# Altium PCB Sampler_4HP.PCBDOC (part 3 of 6)
Units mm, origin at the board's own origin, x right, y up, seen from the top; angles counter-clockwise.
Board outline 159.99 x 100 mm, 4 copper layers (Top, GP1(GND), L3, Bot), stack 1.648 mm thick; 546 components, 321 nets, 1657 pads, 795 vias.
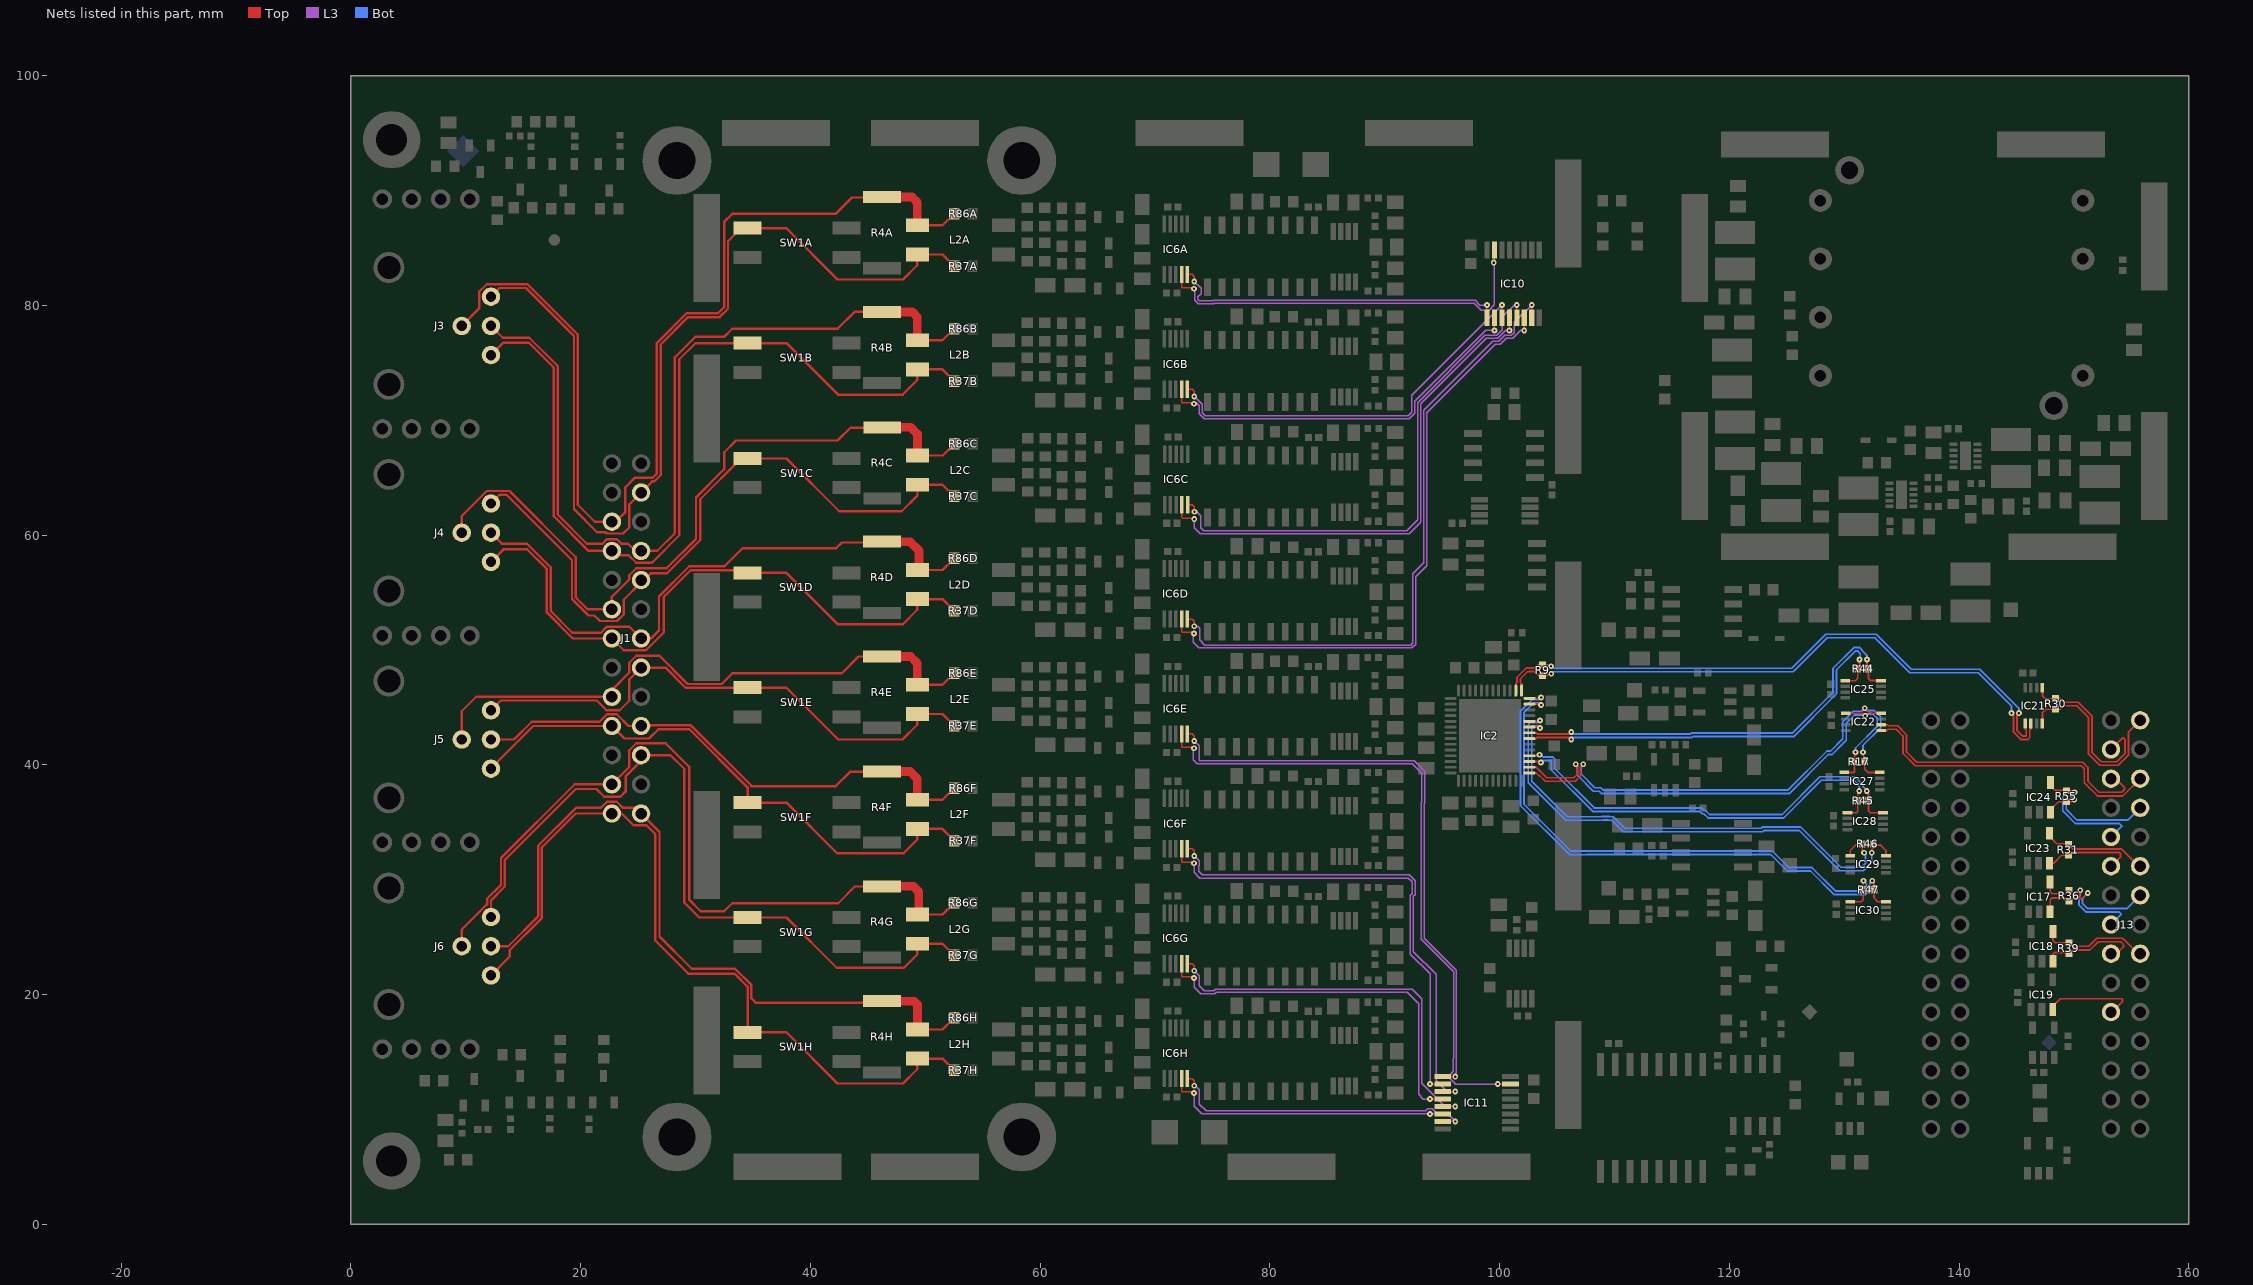
[diagram p4: the nets of this part, all layers, seen from the top]

## Part data (continued)
R53: library part R0402_51K_1%_0.0625W_100PPM, "Resistor - 1%", Case=0402, Manufacturer=GENERIC, Manufacturer1 ComponentHeight=0.4mm, Manufacturer1 Example="YAGEO PHYCOMP", Manufacturer1 Part Number=232270674703L, Power=0.0625W, Tolerance=±1%, Author="CERN DEM JLC", Component Type=Standard, CreateDate=03.12.2007, HelpURL=\\cern.ch\dfs\Applications\Altium\Datasheets\R0402_Phycomp_RC0402.pdf, LatestRevisionDate=17.10.2012, Manufacturer Part Number=R0402_51K_1%_0.0625W_100PPM, Mounted=Yes, Part Description="General Purpose Thick Film Chip Resistor", Part Number=R0402_51K_1%_0.0625W_100PPM, Pin Count=2, PressFit=No, Sense=No, SMD=Yes, Socket=No, Status="Not Recommended", TC=±100ppm/°C
R54: library part R0402_47K_1%_0.0625W_100PPM, "Resistor - 1%", Case=0402, Manufacturer=GENERIC, Manufacturer1 ComponentHeight=0.4mm, Manufacturer1 Example="YAGEO PHYCOMP", Manufacturer1 Part Number=232270675103L, Power=0.0625W, Tolerance=±1%, Author="CERN DEM JLC", Component Type=Standard, CreateDate=03.12.2007, HelpURL=\\cern.ch\dfs\Applications\Altium\Datasheets\R0402_Phycomp_RC0402.pdf, LatestRevisionDate=17.10.2012, Manufacturer Part Number=R0402_47K_1%_0.0625W_100PPM, Mounted=Yes, Part Description="General Purpose Thick Film Chip Resistor", Part Number=R0402_47K_1%_0.0625W_100PPM, Pin Count=2, PressFit=No, Sense=No, SMD=Yes, Socket=No, Status="Not Recommended", TC=±100ppm/°C
R58 R59 R60 R61 R62 R63 R64 R65 R66 R67: library part R0603_220R_1%_0.1W_100PPM, "Resistor - 1%", Case=0603, Manufacturer=GENERIC, Manufacturer1 ComponentHeight=0.55mm, Manufacturer1 Example="NIC COMPONENT", Manufacturer1 Part Number=NRC06F2200TRF, Power=0.1W, Tolerance=±1%, Author="CERN DEM JLC", Component Type=Standard, CreateDate=03.12.2007, HelpURL=\\cern.ch\dfs\Applications\Altium\Datasheets\R0603_NIC_NRC.pdf, LatestRevisionDate=13.03.2008, Manufacturer Part Number=R0603_220R_1%_0.1W_100PPM, Mounted=Yes, Part Description="General Purpose Thick Film Chip Resistor", Part Number=R0603_220R_1%_0.1W_100PPM, Pin Count=2, Sense=No, SMD=Yes, Socket=No, Status=Preferred, TC=±100ppm/°C
RN1A RN1B RN1C RN1D RN1E RN1F RN1G RN1H RN2A RN2B RN2C RN2D RN2E RN2F RN2G RN2H RN3 RN4: library part RN_10K_5K_VISHAY_AORN2-1AT3, "DIL8 Resistor Network 4 Resistors 10k-5k-5k-10k 0.1%", Case=SOIC8, Manufacturer="VISHAY DALE", Manufacturer Part Number=AORN2-1AT3, Power=4x0.1W, Tolerance=0.1%, Author="CERN DEM JLC", ComponentHeight=1.73mm, Component Type=Standard, CreateDate=20.02.2017, HelpURL=\\cern.ch\dfs\Applications\Altium\Datasheets\RN_VISHAY_AORN.pdf, LatestRevisionDate=20.02.2017, Mounted=Yes, Part Description="Dual-In-Line Thin Film Precision Automotive Resistors Network, (4 Isolated) - AORN Series", Part Number=RN_10K_5K_VISHAY_AORN2-1AT3, Pin Count=8, PressFit=No, Sense=No, SMD=Yes, Socket=No, TC=±25ppm/°C
SW1A SW1B SW1C SW1D SW1E SW1F SW1G SW1H: library part SW_CTS_204-121ST, "2x SPST DIP Switch 1NO + 1NF", Manufacturer=CTS, Manufacturer Part Number=204-121ST, Author="CERN DEM JLC", ComponentHeight=10.36mm, Component Type=Standard, CreateDate=28.08.2014, Family=Switch, HelpURL=\\cern.ch\dfs\Applications\Altium\Datasheets\SW_CTS_204-121ST.pdf, LatestRevisionDate=28.08.2014, Mounted=Yes, PackageDescription="Body 7.26 x 9.78mm, 2x SPST DIP, 1NO + 1NF Switch, CTS 204 Series", Part Description="Coupled SPST DIP Switch, 1NO + 1NF, CTS 204 Series", Part Number=SW_CTS_204-121ST, Pin Count=4, PressFit=No, Sense=No, SMD=Yes, Socket=No, Status=None
T1 T2 T3 T4 T5 T6 T7 T8 T9: "N-CHANNEL MOSFET WITH DIODE", Case=SOT23-3, Manufacturer="ON SEMICONDUCTOR", Author="CERN DEM JLC", Bonding=No, ComponentHeight=1.11mm, Component Type=Standard, CreateDate=23.03.2009, Device=BSS138LT1G, HelpURL=\\cern.ch\dfs\Applications\Altium\Datasheets\BSS138LT1G.pdf, LatestRevisionDate=23.03.2009, Manufacturer Part Number=BSS138LT1G, Mounted=Yes, PackageDescription="SOT23 3-Leads, Pitch 0.95mm - Body 1.4x3mm, IPC Medium Density", Part Description="50V 200mA N-Channel Enhancement Mode Field-Effect Transistor", Part Number=BSS138LT1G, Pin Count=3, PressFit=No, Sense=No, SMD=Yes, Socket=No
TP1 TP2 TP3 TP4 TP5 TP6 TP7 TP8 TP9 TP10 TP11 TP12 TP13: library part SMD_PAD_1.27X1.27MM, Author="CERN DEM JLC", ComponentHeight=0mm, Component Type="Standard (No BOM)", CreateDate=12.01.2008, Family="Test Point", HelpURL=Undefined, LatestRevisionDate=12.01.2008, Mounted=No, PackageDescription="1.27mm x 1.27mm PCB Copper Area (SMD Test Point)", Part Description="1.27mm x 1.27mm PCB Copper Area (SMD Test Point)", Part Number=SMD_PAD_1.27X1.27MM, Pin Count=1, Sense=No, SMD=Yes, Socket=No, Status=None

## Free pads (board coordinates)
  round 6 hole 3.2: 0(58.4,7.6) 1(58.4,92.6) 2(28.4,92.6) 3(28.4,7.6)

## Via types
v1: diameter 0.5, hole 0.2, Top to Bot, tented both sides, 760 vias
v2: diameter 0.6, hole 0.3, Top to Bot, tented both sides, 15 vias
v3: diameter 1, hole 0.6, Top to Bot, tented both sides, 8 vias
v4: diameter 0.5, hole 0.2, Top to Bot, 6 vias
v5: diameter 0.6, hole 0.3, Top to Bot, 6 vias

## Nets (pads, with @x,y where several pads share a name; then routed paths per layer and width w, separated by ;. In a path a pad name is that pad's centre, name@x,y a point inside that pad or via, vN(x,y) a via of type N, cw(c..) or ccw(c..) an arc to the next point about the centre after c; other vN are vias at no path point)
ADC_CLKOUT_N: IC2.34 IC25.8 R44.2 | length 37.5
  Top w0.152: IC2.34@102.595,42.785 103.196,42.785 103.294,42.688 106.076,42.688 v1(106.25,42.862) ; v1(131.983,49.171) 131.983,48.509 R44.2@132.126,48.365 132.126,47.506 132.286,47.346 133.181,47.346 IC25.8@133.202,47.325
  Bot w0.152: v1(106.25,42.862) 106.25,42.738 106.3,42.688 116.616,42.688 116.686,42.758 125.483,42.758 129.03,46.305 129.03,48.405 130.83,50.205 131.351,50.205 131.53,50.026 131.53,49.976 131.616,49.891 131.983,49.523 v1(131.983,49.171)
ADC_CLKOUT_P: IC2.33 IC25.1 R44.1 | length 36.9
  Top w0.152: IC2.33@102.595,42.285 103.196,42.285 103.294,42.383 106.076,42.383 v1(106.25,42.209) ; IC25.1@130.102,47.325 130.99,47.325 131.186,47.521 R44.1@131.186,48.365 131.33,48.509 v1(131.33,49.171)
  Bot w0.152: v1(106.25,42.209) 106.25,42.333 106.3,42.383 116.742,42.383 116.812,42.453 125.609,42.453 129.156,46 129.335,46.179 129.335,48.279 130.956,49.9 131.225,49.9 131.225,49.85 131.4,49.675 131.4,49.241 v1(131.33,49.171)
ADC_IN_N0: J1.23 J3.1 L2A.2 R37A.1 SW1A.1 | length 84.3
  Top w0.203: J3.1@12.2,80.746 12.954,81.5 15.25,81.5 19.431,77.319 19.431,62.255 21.438,60.249 22.186,60.249 22.304,60.131 23.708,60.131 24.241,60.665 24.241,62.671 J1.23@25.27,63.7 26.24,64.67 26.42,64.67 26.975,65.225 26.975,76.583 29.362,78.97 32.107,78.97 32.832,79.695 32.832,85.573 33.969,86.71 SW1A.1@34.542,86.71 37.922,86.71 42.382,82.25 48.073,82.25 49.316,83.493 L2A.2@49.316,84.424 51.504,84.424 R37A.1@52.52,83.408
ADC_IN_N1: J1.20 J3.3 L2B.2 R37B.1 SW1B.1 | length 76.9
  Top w0.203: J3.3@12.2,75.666 13.284,76.75 15.5,76.75 17.678,74.572 17.678,61.646 20.704,58.62 J1.20@22.73,58.62 23.1,58.25 24.185,58.25 24.844,57.591 26.216,57.591 28.6,59.975 28.6,75.3 30,76.7 33.959,76.7 33.969,76.71 SW1B.1@34.542,76.71 37.922,76.71 42.407,72.225 48.048,72.225 49.316,73.493 L2B.2@49.316,74.424 51.504,74.424 R37B.1@52.52,73.408
ADC_IN_N2: J1.17 J4.1 L2C.2 R37C.1 SW1C.1 | length 59.6
  Top w0.203: J4.1@12.2,62.746 12.954,63.5 13.549,63.5 19.25,57.799 19.25,54.436 20.686,53 21.193,53 21.682,52.511 23.174,52.511 23.759,53.096 23.759,54.369 J1.17@25.27,55.88 ; J1.17@25.27,56.08 25.53,56.08 26.125,56.675 27.525,56.675 30.425,59.575 30.425,63.109 33.981,66.666 SW1C.1@34.555,66.666 37.935,66.666 42.526,62.075 47.954,62.075 49.329,63.449 L2C.2@49.329,64.38 51.517,64.38 R37C.1@52.533,63.364
ADC_IN_N3: J1.14 J4.3 L2D.2 R37D.1 SW1D.1 | length 55.2
  Top w0.203: J4.3@12.2,57.666 13.284,58.75 15.367,58.75 17.069,57.048 17.069,53.248 19.317,51 J1.14@22.73,51 23.759,49.971 25.696,49.971 27.25,51.525 27.25,54.6 29.6,56.95 33.729,56.95 33.969,56.71 SW1D.1@34.542,56.71 37.922,56.71 42.407,52.225 48.048,52.225 49.316,53.493 L2D.2@49.316,54.424 51.504,54.424 R37D.1@52.52,53.408
ADC_IN_N4: J1.11 J5.1 L2E.2 R37E.1 SW1E.1 | length 48.1
  Top w0.203: J5.1@12.2,44.746 13.047,45.593 21.404,45.593 22.25,44.746 23.41,44.746 24.241,45.577 24.241,47.431 J1.11@25.27,48.46 27.39,48.46 29.14,46.71 SW1E.1@34.542,46.71 37.922,46.71 42.432,42.2 48.023,42.2 49.316,43.493 L2E.2@49.316,44.424 51.504,44.424 R37E.1@52.52,43.408
ADC_IN_N5: J1.8 J5.3 L2F.2 R37F.1 SW1F.1 | length 49.8
  Top w0.203: J5.3@12.2,39.666 12.2,39.7 15.88,43.38 J1.8@22.73,43.38 23.819,42.291 26,42.291 26,42.325 26.775,43.1 29.475,43.1 34.542,38.033 SW1F.1@34.542,36.71 37.922,36.71 42.332,32.3 48.123,32.3 49.316,33.493 L2F.2@49.316,34.424 51.504,34.424 R37F.1@52.52,33.408
ADC_IN_N6: J1.5 J6.1 L2G.2 R37G.1 SW1G.1 | length 65.8
  Top w0.203: J6.1@12.2,26.746 12.2,28.2 13.411,29.411 13.411,31.725 19.583,37.897 21.387,37.897 22.073,37.211 23.47,37.211 23.927,37.668 23.927,38.989 J1.5@25.27,40.332 ; J1.5@25.27,40.84 27.835,40.84 29.025,39.65 29.025,28.025 30.34,26.71 SW1G.1@34.542,26.71 37.922,26.71 42.307,22.325 48.148,22.325 49.316,23.493 L2G.2@49.316,24.424 51.504,24.424 R37G.1@52.52,23.408
ADC_IN_N7: J1.2 J6.3 L2H.2 R37H.1 SW1H.1 | length 69.5
  Top w0.203: J6.3@12.2,21.666 13.843,23.309 13.843,23.876 16.637,26.67 16.637,32.817 19.58,35.76 J1.2@22.73,35.76 23.593,35.76 24.614,34.739 24.836,34.739 24.844,34.731 25.744,34.731 26.5,33.975 26.5,24.7 29.375,21.825 33.4,21.825 34.542,20.683 SW1H.1@34.542,16.71 37.922,16.71 42.382,12.25 48.073,12.25 49.316,13.493 L2H.2@49.316,14.424 51.504,14.424 R37H.1@52.52,13.408
ADC_IN_P0: J1.22 J3.4 L2A.1 R4A.2 R86A.1 | length 89
  Top w0.203: J3.4@9.66,78.206 11.171,79.718 11.171,81.172 11.829,81.83 15.387,81.83 19.761,77.456 19.761,62.636 21.238,61.16 J1.22@22.73,61.16 23.063,61.16 23.903,62 23.903,64.153 24.75,65 26.283,65 26.645,65.362 26.645,76.72 29.225,79.3 31.97,79.3 32.502,79.832 32.502,87.253 33.205,87.956 42.206,87.956 43.633,89.383 46.208,89.383 R4A.2@46.25,89.425 ; L2A.1@49.316,86.964 51.517,86.964 52.403,87.85 52.403,87.863 R86A.1@52.52,87.98
  Top w0.762: R4A.2@46.25,89.425 48.85,89.425 49.316,88.959 L2A.1@49.316,86.964
ADC_IN_P1: J1.19 J3.2 L2B.1 R4B.2 R86B.1 | length 76.6
  Top w0.203: J3.2@12.2,78.206 13.229,77.178 15.539,77.178 18.009,74.708 18.009,61.783 20.541,59.25 21.905,59.25 22.304,59.649 23.156,59.649 23.555,59.25 24.138,59.25 24.763,58.625 26.675,58.625 28.194,60.144 28.194,75.468 29.978,77.253 32.502,77.253 33.205,77.956 42.381,77.956 43.85,79.425 46.1,79.425 46.175,79.35 R4B.2@46.25,79.425 ; L2B.1@49.316,76.964 51.517,76.964 52.403,77.85 52.403,77.863 R86B.1@52.52,77.98
  Top w0.762: R4B.2@46.25,79.425 48.875,79.425 49.316,78.984 L2B.1@49.316,76.964
ADC_IN_P2: J1.16 J4.4 L2C.1 R4C.2 R86C.1 | length 64.5
  Top w0.203: J4.4@9.66,60.206 9.66,61.661 11.829,63.83 13.818,63.83 19.58,58.068 19.58,54.573 20.613,53.54 J1.16@22.73,53.54 22.73,54.625 24.241,56.137 24.241,56.506 24.844,57.109 27.492,57.109 30.05,59.667 30.05,63.275 32.514,65.739 32.514,67.209 33.53,68.225 42.375,68.225 43.5,69.35 46.21,69.35 46.221,69.339 R4C.2@46.263,69.381 ; L2C.1@49.329,66.92 51.529,66.92 52.416,67.806 52.416,67.819 R86C.1@52.533,67.936
  Top w0.762: R4C.2@46.263,69.381 48.744,69.381 49.325,68.8 49.325,66.924 L2C.1@49.329,66.92
ADC_IN_P3: J1.13 J4.2 L2D.1 R4D.2 R86D.1 | length 54.7
  Top w0.203: J4.2@12.2,60.206 13.156,59.25 15.334,59.25 17.399,57.185 17.399,53.385 19.284,51.5 21.775,51.5 22.304,52.029 24.241,52.029 J1.13@25.27,51 26.125,51 26.825,51.7 26.825,54.642 29.463,57.28 32.529,57.28 34.099,58.85 42.25,58.85 42.75,59.35 46.175,59.35 R4D.2@46.25,59.425 ; L2D.1@49.316,56.964 51.517,56.964 52.403,57.85 52.403,57.863 R86D.1@52.52,57.98
  Top w0.762: R4D.2@46.25,59.425 48.675,59.425 49.475,58.625 49.475,57.123 L2D.1@49.316,56.964
ADC_IN_P4: J1.10 J5.4 L2E.1 R4E.2 R86E.1 | length 52.7
  Top w0.203: J5.4@9.66,42.206 9.66,44.66 10.923,45.923 22.727,45.923 J1.10@22.73,45.92 22.73,46.523 24.241,48.034 24.241,48.886 24.844,49.489 26.861,49.489 29.31,47.04 32.289,47.04 33.205,47.956 42.731,47.956 44.2,49.425 46.166,49.425 46.208,49.383 R4E.2@46.25,49.425 ; L2E.1@49.316,46.964 51.517,46.964 52.403,47.85 52.403,47.863 R86E.1@52.52,47.98
  Top w0.762: R4E.2@46.25,49.425 48.725,49.425 49.316,48.834 L2E.1@49.316,46.964
ADC_IN_P5: J1.7 J5.2 L2F.1 R4F.2 R86F.1 | length 47
  Top w0.203: J5.2@12.2,42.206 14.206,42.206 15.75,43.75 21.645,43.75 22.304,44.409 23.156,44.409 24.185,43.38 J1.7@25.27,43.38 25.32,43.43 29.612,43.43 34.872,38.17 34.872,38.128 42.203,38.128 43.458,39.383 46.208,39.383 R4F.2@46.25,39.425 ; L2F.1@49.316,36.964 51.517,36.964 52.403,37.85 52.403,37.863 R86F.1@52.52,37.98
  Top w0.762: R4F.2@46.25,39.425 48.675,39.425 49.316,38.784 L2F.1@49.316,36.964
ADC_IN_P6: J1.4 J6.4 L2G.1 R4G.2 R86G.1 | length 70
  Top w0.203: J6.4@9.66,24.206 9.66,25.661 11.774,27.775 11.87,27.87 11.87,28.337 13.081,29.548 13.081,31.877 19.504,38.3 J1.4@22.73,38.3 24.241,39.811 24.241,41.266 24.844,41.869 27.406,41.869 29.45,39.825 29.45,28.275 30.472,27.253 32.502,27.253 33.205,27.956 42.431,27.956 43.875,29.4 46.225,29.4 R4G.2@46.25,29.425 ; L2G.1@49.45,26.964 51.517,26.964 52.403,27.85 52.403,27.863 R86G.1@52.52,27.98
  Top w0.762: R4G.2@46.25,29.425 48.975,29.425 49.45,28.95 49.45,26.964 L2G.1@49.316,26.964
ADC_IN_P7: J1.1 J6.2 L2H.1 R4H.2 R86H.1 | length 64.4
  Top w0.203: J6.2@12.2,24.206 13.706,24.206 16.307,26.807 16.307,32.954 19.603,36.25 21.765,36.25 22.304,36.789 23.156,36.789 23.695,36.25 J1.1@24.78,36.25 ; J1.1@25.27,35.76 26.875,34.155 26.875,25.05 29.675,22.25 33.442,22.25 34.872,20.82 34.872,19.675 35.272,19.275 R4H.2@46.25,19.275 ; L2H.1@49.316,16.964 51.517,16.964 52.403,17.85 52.403,17.863 R86H.1@52.52,17.98
  Top w0.762: R4H.2@46.25,19.425 49.025,19.425 49.325,19.125 49.325,16.973 L2H.1@49.316,16.964
ADC_SCK_N: IC2.42 IC21.5 R9.1 | length 53.4
  Top w0.152: IC2.42@101.42,46.46 101.42,47.062 101.518,47.159 101.518,47.612 102.334,48.428 103.072,48.428 103.364,48.72 R9.1@103.75,48.72 104.136,48.72 104.267,48.589 v1(104.473,48.589) ; v1(145.212,44.5) 145.039,44.326 145.039,43 145.539,42.5 145.855,42.5 145.855,43.005 145.757,43.103 IC21.5@145.757,43.604
  Bot w0.152: v1@104.55,48.563 104.711,48.402 125.452,48.402 128.405,51.355 132.801,51.355 135.843,48.313 141.812,48.313 145.212,44.913 v1(145.212,44.5)
ADC_SCK_P: IC2.41 IC21.6 R9.2 | length 53.4
  Top w0.152: IC2.41@101.92,46.46 101.92,47.062 101.822,47.159 101.822,47.485 102.46,48.123 103.021,48.123 103.364,47.78 R9.2@103.75,47.78 104.136,47.78 104.293,47.937 v1(104.5,47.937) ; v1(144.56,44.5) 144.734,44.326 144.734,42.874 145.412,42.195 145.981,42.195 146.16,42.374 146.16,43.005 146.257,43.103 IC21.6@146.257,43.604
  Bot w0.152: v1(104.5,47.937) 104.661,48.098 125.579,48.098 128.531,51.05 132.675,51.05 135.717,48.008 141.686,48.008 144.56,45.134 v1(144.56,44.5)
ADC_SDOA_N: IC2.28 IC22.1 IC27.1 R17.1 | length 45.6
  Top w0.152: IC2.28@102.595,39.785 103.196,39.785 104.107,38.875 106.475,38.875 106.748,39.148 106.748,39.927 v1(106.625,40.05) ; IC27.1@130.006,39.336 130.856,39.336 130.906,39.386 130.906,40.216 R17.1@130.848,40.274 130.848,40.661 130.992,40.804 v1(130.992,41.086) ; IC22.1@130.135,44.487 131.581,44.487 131.791,44.277 v1(131.831,44.277)
  Bot w0.152: v1(106.625,40.05) 106.799,39.876 106.799,39.074 108.169,37.703 108.688,37.703 108.896,37.495 125.227,37.495 128.632,40.9 128.956,40.9 129.931,41.875 130.193,42.137 130.193,43.612 130.924,44.343 131.831,44.343 v1(131.831,44.277) 131.979,44.425 132.5,44.425 132.875,44.05 132.875,43.35 130.992,41.467 v1(130.992,41.086)
ADC_SDOA_P: IC2.27 IC22.8 IC27.8 R17.2 | length 46.1
  Top w0.152: IC2.27@102.595,39.285 103.196,39.285 103.457,39.025 103.526,39.025 103.98,38.57 106.601,38.57 107.053,39.022 107.053,39.801 107.277,40.026 v1(107.277,40.05) ; v1(131.644,41.086) 131.644,40.804 131.788,40.661 R17.2@131.788,40.274 131.788,39.609 132.061,39.336 IC27.8@133.106,39.336 ; v1@131.784,44.851 131.905,44.73 132.019,44.73 132.221,44.529 132.337,44.529 132.378,44.487 IC22.8@133.235,44.487
  Bot w0.152: v1(107.277,40.05) 107.104,39.876 107.104,39.2 108.296,38.008 108.814,38.008 109.022,37.8 125.101,37.8 128.506,41.205 128.83,41.205 129.889,42.264 129.889,43.739 130.805,44.655 131.523,44.655 v1(131.795,44.927) 131.992,44.73 132.019,44.73 ; v1(131.644,41.086) 131.644,41.688 133.18,43.224 133.18,44.176 132.626,44.73 132.02,44.73
ADC_SDOB_N: IC2.30 IC28.8 R45.2 | length 37.3
  Top w0.152: IC2.30@102.595,40.785 103.524,40.785 103.48,40.829 v1(103.48,40.877) ; v1(131.975,37.711) 132.119,37.567 R45.2@132.119,36.871 132.119,36.003 132.286,35.836 IC28.8@133.386,35.836
  Bot w0.152: v1(103.48,40.877) 103.585,40.877 103.774,40.688 104.626,40.688 104.805,40.509 104.805,40.146 104.797,40.138 104.797,39.762 104.805,39.754 104.805,39.676 108.231,36.25 117.567,36.25 117.768,36.049 117.81,36.049 117.812,36.047 117.909,36.047 118.281,35.675 124.6,35.675 127.88,38.955 130.947,38.955 131.628,38.274 131.628,38.148 131.975,37.8 v1(131.975,37.711)
ADC_SDOB_P: IC2.29 IC28.1 R45.1 | length 36.4
  Top w0.152: IC2.29@102.595,40.285 103.524,40.285 v1(103.6,40.209) ; IC28.1@130.286,35.836 131.086,35.836 131.186,35.936 131.186,36.864 R45.1@131.179,36.871 131.179,37.567 v1(131.323,37.711)
  L3 w0.152: v1(103.6,40.209) v1@103.6,40.383
  Bot w0.152: v1(103.6,40.209) 103.774,40.383 104.5,40.383 104.5,40.272 104.492,40.264 104.492,39.636 104.5,39.628 104.5,39.55 108.105,35.945 117.44,35.945 117.642,35.744 117.684,35.744 117.686,35.742 117.783,35.742 118.155,35.37 124.726,35.37 128.006,38.65 130.82,38.65 131.323,38.148 v1(131.323,37.711)
ADC_SDOC_N: IC2.36 IC29.8 R46.2 | length 43.9
  Top w0.127: R46.2@132.522,33.011 R46.2@132.522,33.11
  Top w0.152: IC2.36@102.595,43.785 103.449,43.785 v1(103.525,43.862) ; v1@132.365,32.58 132.522,32.737 132.522,33.011 133.17,33.011 133.636,32.544 IC29.8@133.636,32.086
  Bot w0.152: v1(103.525,43.862) 103.351,43.688 102.699,43.688 102.495,43.484 102.495,38.449 105.774,35.17 109.029,35.17 109.062,35.203 109.438,35.203 109.471,35.17 109.774,35.17 110.774,34.17 122.904,34.17 123.012,34.278 126.097,34.278 129.605,30.77 131.651,30.77 132.394,31.513 v1(132.394,32.337)
ADC_SDOC_P: IC2.35 IC29.1 R46.1 | length 42.5
  Top w0.152: IC2.35@102.595,43.285 103.196,43.285 103.205,43.294 103.44,43.294 v1(103.525,43.209) ; IC29.1@130.536,32.086 130.536,32.536 131.111,33.11 R46.1@131.582,33.11 131.582,32.492 v1(131.738,32.336)
  Bot w0.152: v1(103.525,43.209) 103.351,43.383 102.825,43.383 102.8,43.358 102.8,38.575 105.9,35.475 108.903,35.475 108.936,35.508 109.564,35.508 109.597,35.475 109.9,35.475 110.9,34.475 122.778,34.475 122.886,34.583 126.223,34.583 129.731,31.075 131.525,31.075 131.85,31.4 131.85,32.224 v1(131.738,32.336)
ADC_SDOD_N: IC2.40 IC30.8 R47.2 | length 48.9
  Top w0.152: IC2.40@102.595,45.785 103.544,45.785 v1(103.62,45.862) ; v1@132.511,29.844 132.598,29.758 R47.2@132.598,29.121 132.598,28.427 132.939,28.086 IC30.8@133.636,28.086
  Bot w0.152: v1(103.62,45.862) 103.446,45.688 102.849,45.688 101.82,44.659 101.82,44.376 101.823,44.373 101.823,43.998 101.82,43.995 101.82,43.276 101.823,43.273 101.823,36.446 106.105,32.164 107.568,32.164 107.6,32.195 123.605,32.195 124.959,30.841 125.049,30.751 127.068,30.751 129.099,28.72 131.876,28.72 132.255,29.099 132.255,29.733 v1(132.439,29.917)
ADC_SDOD_P: IC2.39 IC30.1 R47.1 | length 47.6
  Top w0.127: v1@131.658,29.886 v1(131.689,29.917)
  Top w0.152: IC2.39@102.595,45.285 103.544,45.285 v1(103.62,45.209) ; IC30.1@130.536,28.086 131.486,28.086 131.658,28.257 R47.1@131.658,29.121 v1@131.658,29.886
  Bot w0.152: v1(103.62,45.209) 103.446,45.383 102.975,45.383 102.125,44.533 102.125,44.502 102.128,44.499 102.128,43.871 102.125,43.868 102.125,43.402 102.128,43.399 102.128,36.572 103.42,35.28 106.2,32.5 123.731,32.5 125.175,31.056 127.194,31.056 129.225,29.025 131.75,29.025 131.95,29.225 131.95,29.656 v1(131.689,29.917)
CH0_A0: IC6A.4 IC10.15 | length 35.2
  Top w0.127: IC6A.4@72.331,82.687 72.331,81.578 72.381,81.528 73.31,81.528 v1(73.406,81.432) ; IC10.15@99.483,84.74 IC10.15@99.56,84.817 99.56,83.777 v1(99.5,83.717)
  L3 w0.127: v1(73.406,81.432) 73.49,81.517 73.49,80.85 73.475,80.835 73.475,80.422 73.767,80.13 75.129,80.13 75.164,80.165 97.785,80.165 98.4,79.55 98.933,79.55 98.961,79.579 99.092,79.579 99.56,80.046 99.56,83.777 v1(99.5,83.717)
CH0_A1: IC6A.5 IC10.1 | length 29.5
  Top w0.127: IC6A.5@72.831,82.687 73.244,82.687 73.431,82.499 v1(73.431,82.067) ; IC10.1@98.91,78.917 v1(98.91,80.019)
  L3 w0.127: v1(73.431,82.067) 74.025,81.474 74.025,81.025 73.729,80.729 73.729,80.527 73.872,80.384 75.024,80.384 75.059,80.419 97.89,80.419 98.29,80.019 v1(98.91,80.019)
CH1_A0: IC6B.4 IC10.2 | length 34.3
  Top w0.127: IC6B.4@72.331,72.687 72.331,71.578 72.381,71.528 73.31,71.528 v1(73.406,71.432) ; v1(99.56,77.815) IC10.2@99.56,78.917
  L3 w0.127: v1(73.406,71.432) 73.49,71.517 73.599,71.517 73.871,71.245 73.871,70.545 74.295,70.121 92.155,70.121 92.629,70.595 92.629,71.638 98.806,77.815 v1(99.56,77.815)
CH1_A1: IC6B.5 IC10.3 | length 35
  Top w0.127: IC6B.5@72.831,72.687 73.244,72.687 73.431,72.499 v1(73.431,72.067) ; IC10.3@100.21,78.917 v1(100.21,80.019)
  L3 w0.127: v1(73.431,72.067) 74.125,71.374 74.125,70.65 74.4,70.375 92.05,70.375 92.375,70.7 92.375,72.185 v1(100.21,80.019)
CH2_A0: IC6C.4 IC10.4 | length 45.3
  Top w0.127: IC6C.4@72.344,62.643 72.344,61.534 72.394,61.484 73.323,61.484 v1(73.419,61.389) ; v1(100.86,77.815) IC10.4@100.86,78.917
  L3 w0.127: v1@73.503,61.473 v1(73.419,61.389) 73.419,60.656 73.954,60.121 92.146,60.121 93.137,61.112 93.137,71.428 98.83,77.121 99.847,77.121 100.562,77.836 100.839,77.836 100.86,77.857 v1(100.86,77.815)
CH2_A1: IC6C.5 IC10.5 | length 46.3
  Top w0.127: IC6C.5@72.844,62.643 73.256,62.643 73.444,62.455 v1(73.444,62.024) ; IC10.5@101.51,78.917 v1(101.51,80.019)
  L3 w0.127: v1(73.444,62.024) 73.651,62.024 73.975,61.7 73.975,60.65 74.25,60.375 91.925,60.375 92.883,61.333 92.883,71.533 98.725,77.375 99.742,77.375 100.25,77.883 100.25,79 101.269,80.019 v1(101.51,80.019)
CH3_A0: IC6D.4 IC10.6 | length 56
  Top w0.127: IC6D.4@72.331,52.687 72.331,51.578 72.381,51.528 73.31,51.528 v1(73.406,51.432) ; v1(102.16,77.815) IC10.6@102.16,78.917
  L3 w0.127: v1@73.49,51.517 v1(73.406,51.432) 73.325,51.351 73.325,50.65 73.804,50.171 92.379,50.171 92.708,50.5 92.708,56.383 93.645,57.32 93.645,70.645 99.613,76.613 100.058,76.613 100.566,77.121 101.147,77.121 101.842,77.815 v1(102.16,77.815)
CH3_A1: IC6D.5 IC10.7 | length 57
  Top w0.127: IC6D.5@72.831,52.687 73.244,52.687 73.431,52.499 v1(73.431,52.067) ; IC10.7@102.81,78.917 v1(102.81,80.019)
  L3 w0.127: v1(73.431,52.067) 73.733,52.067 73.925,51.875 73.925,51.15 73.9,51.125 73.9,50.875 74.35,50.425 92.274,50.425 92.454,50.605 92.454,56.633 93.391,57.57 93.391,70.866 99.392,76.867 99.952,76.867 100.46,77.375 101.042,77.375 101.3,77.633 101.3,78.51 v1(102.81,80.019)
CH4_A0: IC6E.4 IC11.15 | length 57.1
  Top w0.127: IC6E.4@72.331,42.687 72.331,41.578 72.381,41.528 73.31,41.528 v1(73.406,41.432) ; v1(99.853,12.207) IC11.15@100.955,12.207
  L3 w0.127: v1@73.49,41.517 v1(73.406,41.432) 73.35,41.376 73.35,40.425 73.675,40.1 92.4,40.1 93.225,39.275 93.225,36.757 93.206,36.738 93.206,24.794 96,22 96,14.468 95.992,14.46 95.992,13.315 95.716,13.039 95.716,12.674 96.184,12.207 v1(99.853,12.207)
CH4_A1: IC6E.5 IC11.1 | length 51.9
  Top w0.127: IC6E.5@72.831,42.687 73.244,42.687 73.431,42.499 v1(73.431,42.067) ; IC11.1@95.055,12.857 v1(96.157,12.857)
  L3 w0.127: v1(73.431,42.067) 73.846,41.652 73.846,40.369 73.861,40.354 92.571,40.354 93.479,39.446 93.479,36.652 93.46,36.632 93.46,24.9 96.254,22.105 96.254,14.363 96.246,14.355 96.246,12.946 v1(96.157,12.857)
CH5_A0: IC6F.4 IC11.2 | length 42
  Top w0.127: IC6F.4@72.331,32.687 72.331,31.578 72.381,31.528 73.31,31.528 v1(73.406,31.432) ; v1(93.953,12.207) IC11.2@95.055,12.207
  L3 w0.127: v1@73.49,31.517 v1(73.406,31.432) 73.406,30.644 73.925,30.125 92.075,30.125 92.39,29.81 92.39,28.793 92.25,28.652 92.25,23.5 93.953,21.797 v1(93.953,12.207)
CH5_A1: IC6F.5 IC11.3 | length 43.3
  Top w0.127: IC6F.5@72.831,32.687 73.244,32.687 73.431,32.499 v1(73.431,32.067) ; IC11.3@95.055,11.557 v1(96.157,11.557)
  L3 w0.127: v1(73.431,32.067) 73.846,31.652 73.846,31.25 73.8,31.203 73.8,30.725 74.1,30.425 92.134,30.425 92.644,29.915 92.644,28.687 92.504,28.547 92.504,23.746 94.5,21.75 94.5,12.5 95.443,11.557 v1(96.157,11.557)
CH6_A0: IC6G.4 IC11.4 | length 33.6
  Top w0.127: IC6G.4@72.331,22.687 72.331,21.578 72.381,21.528 73.31,21.528 v1(73.406,21.432) ; v1(93.953,10.907) IC11.4@95.055,10.907
  L3 w0.127: v1@73.49,21.517 v1(73.406,21.432) 73.406,20.619 73.975,20.05 75.205,20.05 75.346,20.191 91.959,20.191 92.95,19.2 92.95,11.303 93.347,10.907 v1(93.953,10.907)
CH6_A1: IC6G.5 IC11.5 | length 34.8
  Top w0.127: IC6G.5@72.831,22.687 73.244,22.687 73.431,22.499 v1(73.431,22.067) ; IC11.5@95.055,10.257 v1(96.157,10.257)
  L3 w0.127: v1(73.431,22.067) 73.846,21.652 73.846,20.754 74.275,20.325 75.121,20.325 75.241,20.445 92.405,20.445 93.216,19.634 93.216,12.266 95.226,10.257 v1(96.157,10.257)
CH7_A0: IC6H.4 IC11.6 | length 25.4
  Top w0.127: IC6H.4@72.331,12.687 72.331,11.578 72.381,11.528 73.31,11.528 v1(73.406,11.432) ; v1(93.953,9.607) IC11.6@95.055,9.607
  L3 w0.127: v1@73.49,11.517 v1(73.406,11.432) 73.406,10.269 74.068,9.607 v1(93.953,9.607)
CH7_A1: IC6H.5 IC11.7 | length 27.1
  Top w0.127: IC6H.5@72.831,12.687 73.244,12.687 73.431,12.499 v1(73.431,12.067) ; IC11.7@95.055,8.957 v1(96.157,8.957)
  L3 w0.127: v1(73.431,12.067) 73.508,12.067 73.875,11.7 73.875,10.45 74.45,9.875 93.598,9.875 93.77,10.047 94.135,10.047 94.682,9.5 95.613,9.5 v1(96.157,8.957)
EEM0_0_N: IC21.1 J13.3 R30.1 | length 15.4
  Top w0.152: IC21.1@147.257,46.704 147.257,46.006 147.514,45.75 148.384,45.75 R30.1@148.408,45.774 148.794,45.774 149.112,45.456 150.375,45.456 151.568,44.263 151.568,41.079 152.389,40.259 153.739,40.259 154.439,40.959 154.439,42.234 154.309,42.364 154.259,42.364 J13.3@153.23,41.335
EEM0_0_P: IC21.8 J13.2 R30.2 | length 16.5
  Top w0.152: IC21.8@147.257,43.604 147.257,44.519 147.572,44.834 R30.2@148.408,44.834 148.794,44.834 149.112,45.151 150.249,45.151 151.264,44.136 151.264,40.953 152.262,39.954 153.865,39.954 154.743,40.833 154.743,42.848 J13.2@155.77,43.875
EEM0_1_N: IC22.5 J13.6 | length 27.2
  Top w0.152: IC22.5@133.235,42.987 133.737,42.987 133.834,43.085 134.54,43.085 135.125,42.5 135.125,40.994 136.199,39.92 150.63,39.92 150.909,39.641 150.909,38.437 152.062,37.284 154.259,37.284 J13.6@155.77,38.795
EEM0_1_P: IC22.6 J13.5 | length 26.9
  Top w0.152: IC22.6@133.235,43.487 133.737,43.487 133.834,43.39 134.666,43.39 135.43,42.626 135.43,41.12 136.325,40.225 150.756,40.225 151.226,39.755 151.226,38.576 152.189,37.614 154.158,37.614 154.414,37.87 154.414,38.009 153.628,38.795 J13.5@153.23,38.795
EEM0_2_N: IC24.4 J13.9 R55.1 | length 11.6
  Top w0.152: IC24.4@147.953,38.17 148.364,37.759 149.324,37.759 R55.1@149.352,37.731 v1@149.882,37.731
  Bot w0.152: v1@150.039,37.574 149.843,37.574 149.812,37.605 149.399,37.605 149.368,37.574 149.02,37.226 149.02,36.005 150.14,34.885 153.975,34.885 154.18,34.68 154.195,34.68 J13.9@153.23,33.715
  other v1: 150.045,37.611
EEM0_2_P: IC24.3 J13.8 R55.2 | length 11.5
  Top w0.152: IC24.3@147.953,36.084 148.659,36.791 R55.2@149.352,36.791 149.764,36.791 v1@149.92,36.947
  Bot w0.152: v1(150.039,36.947) 149.686,37.3 149.525,37.3 149.325,37.1 149.325,36.131 150.266,35.19 154.705,35.19 J13.8@155.77,36.255
EEM0_3_N: IC23.4 J13.12 R31.1 | length 9.2
  Top w0.152: IC23.4@147.866,34.036 147.866,33.785 148.518,33.133 149.44,33.133 R31.1@149.516,33.057 149.894,32.679 154.132,32.679 155.636,31.175 J13.12@155.77,31.175
EEM0_3_P: IC23.3 J13.11 R31.2 | length 8.1
  Top w0.152: IC23.3@147.866,31.436 148.243,31.436 148.923,32.117 R31.2@149.516,32.117 149.755,32.356 153.988,32.356 154.064,32.28 154.064,32.009 J13.11@153.23,31.175
EEM0_4_N: IC17.4 J13.15 R36.1 | length 10.8
  Top w0.152: IC17.4@147.935,29.795 147.935,28.963 148.114,28.784 149.302,28.784 R36.1@149.584,29.066 149.966,28.684 150.464,28.684 150.588,28.809 150.545,28.852 v1(150.545,29.086)
  Bot w0.152: v1(150.545,29.086) 150.545,28.595 150.436,28.485 150.436,27.808 150.525,27.719 151.049,27.195 153.93,27.195 154.13,26.995 J13.15@153.23,26.095
EEM0_4_P: IC17.3 J13.14 R36.2 | length 11.6
  Top w0.152: IC17.3@147.935,27.195 147.935,28.255 148.089,28.409 149.301,28.409 R36.2@149.584,28.126 149.817,28.359 150.741,28.359 v1(151.216,28.834)
  Bot w0.152: v1(151.216,28.834) 150.741,28.359 150.741,27.934 151.175,27.5 154.635,27.5 J13.14@155.77,28.635
EEM0_5_N: IC18.4 J13.18 R39.1 | length 9.4
  Top w0.152: IC18.4@148.171,25.484 148.171,24.702 148.364,24.509 149.566,24.509 R39.1@149.571,24.504 149.876,24.199 151.279,24.199 151.889,24.809 151.978,24.898 154.205,24.898 154.295,24.809 154.331,24.809 155.585,23.555 J13.18@155.77,23.555
EEM0_5_P: IC18.3 J13.17 R39.2 | length 8.9
  Top w0.152: IC18.3@148.171,22.884 148.171,23.517 148.314,23.659 149.476,23.659 R39.2@149.571,23.564 149.883,23.876 151.387,23.876 152.104,24.594 154.079,24.594 154.314,24.359 154.314,24.147 153.722,23.555 J13.17@153.23,23.555
EEM0_6_N: IC19.3 J13.21 | length 7.8
  Top w0.152: IC19.3@148.236,19.067 148.803,19.634 154.189,19.634 154.239,19.584 154.239,19.409 153.304,18.475 J13.21@153.23,18.475